# Altium PCB MezcladorBF998.PcbDoc
Units mm, origin at the board's own origin, x right, y up, seen from the top; angles counter-clockwise.
Board outline 67.18 x 25.53 mm, 2 copper layers (Top Layer, Bottom Layer), stack 1.671 mm thick; 57 components, 26 nets, 120 pads, 0 vias.
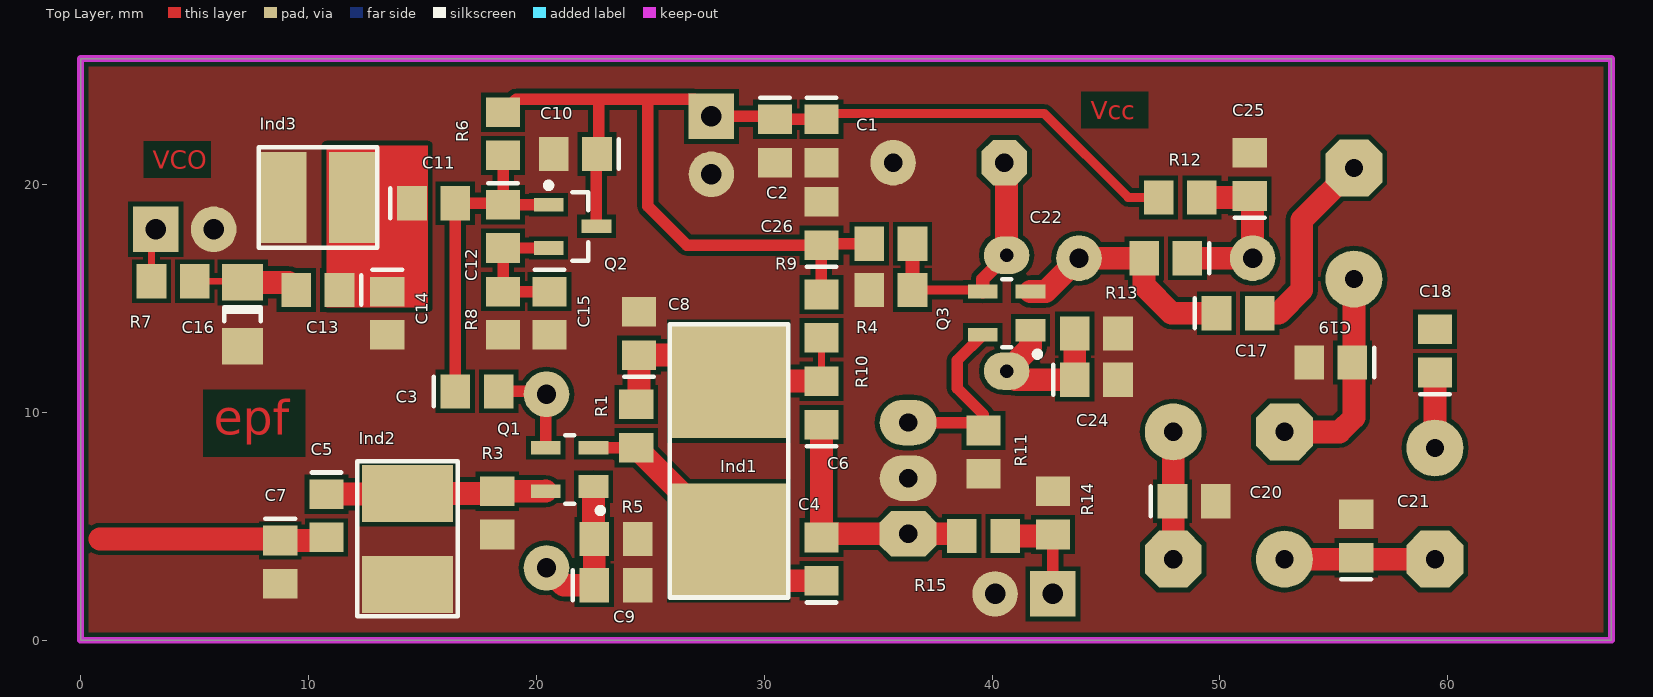
[diagram p0: Top Layer view]
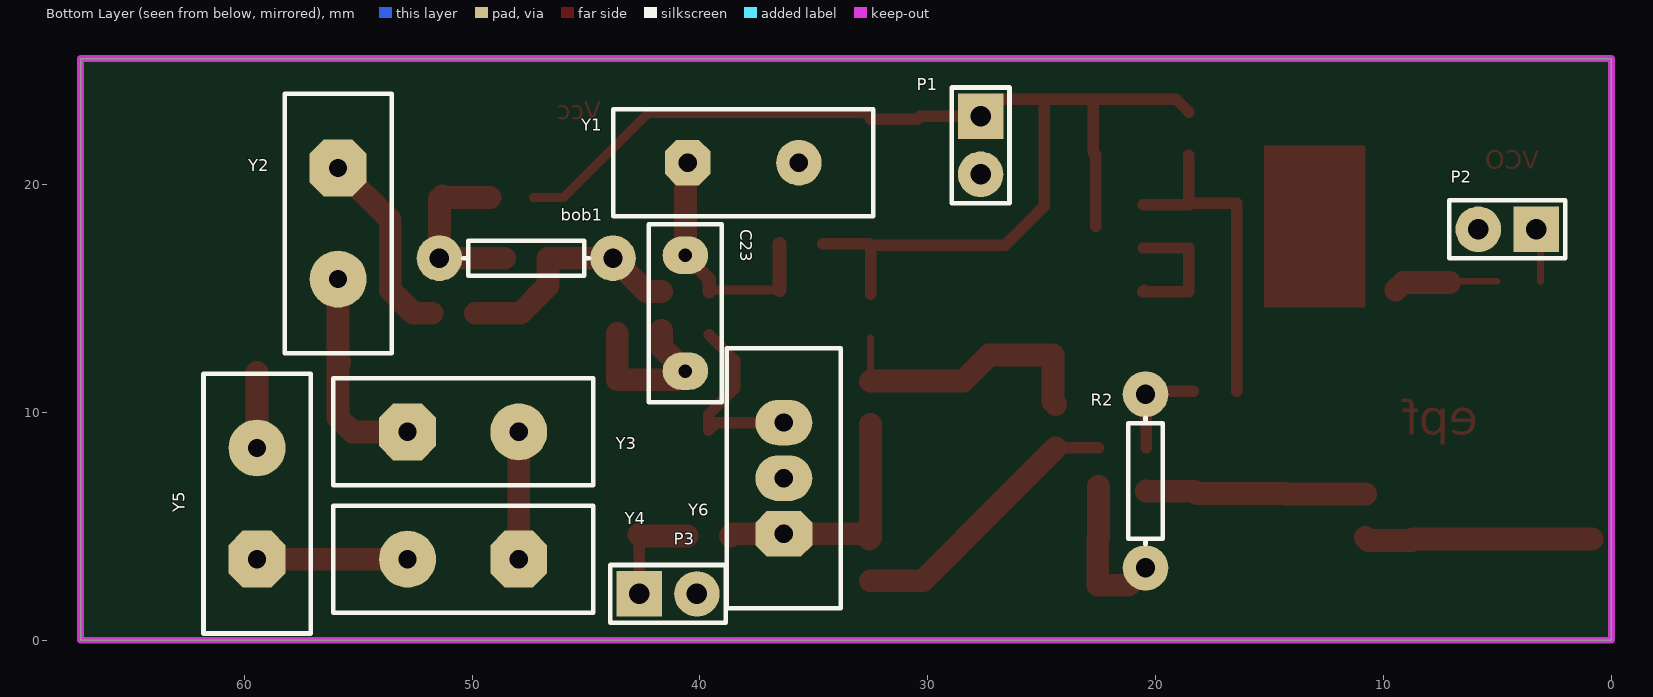
[diagram p1: Bottom Layer view, seen from below]

## Layer stack, top to bottom
Top Layer: signal copper 0.0356
Dielectric: core 1.6, FR-4, Dk 4.8
Bottom Layer: signal copper 0.0356

## Board outline
0,0 67.183,0 67.183,25.527 0,25.527

## Design rules (kind name [scope] priority, off if disabled: settings)
Clearance [All] p1: gap=0.2
PolygonConnect [All] p1: connectstyle=Direct reliefconductorwidth=0.254 reliefentries=4 polygonreliefangle="90 Angle"
RoomDefinition FI2_BF998 [InComponentClass('FI2_BF998')] p1: confinementstyle=ConfineIn formatcopy=TRUE lockcomponents=FALSE outline 29.591,-0.762 63.373,-0.762 63.373,24.384 29.591,24.384
RoomDefinition OsciladorLocal [InComponentClass('OsciladorLocal')] p2: confinementstyle=ConfineIn formatcopy=TRUE lockcomponents=TRUE outline 1.27,8.255 23.876,8.255 23.876,23.876 1.27,23.876
RoomDefinition MixerBF998 [InComponentClass('MixerBF998')] p3: confinementstyle=ConfineIn formatcopy=TRUE lockcomponents=TRUE outline 7.366,0 38.862,0 38.862,16.383 7.366,16.383
RoomDefinition Alimentacion [InComponentClass('Alimentacion')] p4: confinementstyle=ConfineIn formatcopy=TRUE lockcomponents=TRUE outline 25.908,18.669 33.782,18.669 33.782,24.892 25.908,24.892
RoutingVias [All] p1: holewidth=0.6 width=2 viastyle="Through Hole" minholewidth=0.2 minwidth=1.27 maxholewidth=1 maxwidth=3
SilkscreenOverComponentPads [All] p1: minsilkscreentomaskgap=0.254
SolderMaskExpansion [All] p1: expansion=0.102
TestPointUsage [All] p1: valid=0 allowmultiple=FALSE
Testpoint [All] p1: side=15 testpointundercomponent=TRUE minsize=1.016 maxsize=2.54 preferedsize=1.524 minholesize=0 maxholesize=1.016 preferedholesize=0.813 testpointgrid=0.025 style=1023 order=0-112345678
Width [All] p1: maxlimit=3 minlimit=0.2 preferedwidth=1
23 further rules are at their usual default settings.

## Classes and differential pairs
component class FI2_BF998: bob1 C17 C18 C19 C20 C21 C22 C23 C24 C25 C26 P3 Q3 R9 R10 R11 R12 R13 R14 R15 Y1 Y2 Y3 Y4 Y5 Y6
component class OsciladorLocal: C10 C11 C12 C13 C14 C15 C16 Ind3 P2 Q2 R6 R7 R8
component class MixerBF998: C3 C4 C5 C6 C7 C8 C9 Ind1 Ind2 Q1 R1 R2 R3 R4 R5
component class Alimentacion: C1 C2 P1

## Components (designator, comment, footprint, x,y, rotation, side; value= is the part's Value field where it differs from the comment)
bob1 "Res1" AXIAL-0.3#1 47.625,16.764 r180 bottom
C1 "Cap Pol3" C0805 32.512,21.91 r270 top
C2 "Cap Pol3" C0805 30.48,21.91 r270 top
C3 "Cap Pol3" C0805 17.399,10.922 r0 top
C4 "Cap Pol3" C0805 32.512,3.556 r90 top
C5 "Cap Pol3" C0805 10.795,5.461 r270 top
C6 "Cap Pol3" C0805 32.512,10.414 r90 top
C7 "Cap Pol3" C0805 8.763,3.429 r270 top
C8 "Cap Pol3" C0805 24.511,13.462 r90 top
C9 "Cap Pol3" C0805 23.495,2.413 r0 top
C10 "Cap Pol3" C0805 21.717,21.336 r180 top
C11 "Cap Pol3" C0805 15.494,19.177 r0 top
C12 "Cap Pol3" C0805 18.542,18.161 r270 top
C13 "Cap Pol3" C0805 10.414,15.367 r180 top
C14 "Cap Pol3" C0805 13.462,14.351 r270 top
C15 "Cap Pol3" C0805 20.574,14.351 r270 top
C16 "Cap Semi" C1206 7.112,14.303 r270 top
C17 "Cap Pol3" C0805 50.8,14.351 r0 top
C18 "Cap Pol3" C0805 59.436,12.7 r90 top
C19 "Cap Pol3" C0805 54.864,12.192 r180 top
C20 "Cap Pol3" C0805 48.868,6.096 r0 top
C21 "Cap Pol3" C0805 55.98,4.572 r90 top
C22 "Cap Pol3" C0805 47.625,16.764 r180 top
C23 "Cap" VP45-3.2 40.64,14.351 r90 bottom
C24 "Cap Pol3" C0805 44.577,11.43 r0 top
C25 "Cap Pol3" C0805 51.308,20.447 r90 top
C26 "Cap Pol3" C0805 32.512,18.288 r90 top
Ind1 "Ind2" IND_7MM 28.448,7.874 r270 top
Ind2 "Ind2" Ind_4mm 14.351,4.445 r90 top
Ind3 "Ind2" Ind_3mm 10.414,19.431 r0 top
P1 "Header 2" HDR1X2 27.686,22.987 r270 bottom
P2 "Header 2" HDR1X2 3.302,18.034 r0 bottom
P3 "Header 2" HDR1X2 42.672,2.032 r180 bottom
Q1 "BF998" SOT143_N 21.463,7.493 r180 top
Q2 "BFS17" SOT23_N 21.59,18.161 r0 top
Q3 "BF998" SOT143_N 40.64,14.351 r180 top
R1 "Res Semi" 2012[0805] 24.384,9.398 r270 top
R2 "Res1" AXIAL-0.3#2 20.447,6.985 r90 bottom
R3 "Res Semi" 2012[0805] 18.288,5.588 r90 top
R4 "Res Semi" 2012[0805] 32.512,14.224 r270 top
R5 "Res Semi" 2012[0805] 23.495,4.445 r180 top
R6 "Res Semi" 2012[0805] 18.542,22.225 r90 top
R7 "Res Semi" 2012[0805] 4.064,15.753 r0 top
R8 "Res Semi" 2012[0805] 18.542,14.351 r90 top
R9 "Res Semi" 2012[0805] 35.56,15.367 r180 top
R10 "Res Semi" 2012[0805] 35.56,17.399 r0 top
R11 "Res Semi" 2012[0805] 39.624,8.255 r90 top
R12 "Res Semi" 2012[0805] 48.26,19.431 r0 top
R13 "Res Semi" 2012[0805] 44.577,13.462 r180 top
R14 "Res Semi" 2012[0805] 42.672,5.588 r270 top
R15 "Res Semi" 2012[0805] 39.624,4.572 r0 top
Y1 "ECS-49-20-1" HC-49U#1 38.1,20.955 r180 bottom
Y2 "ECS-49-20-1" HC-49U#2 55.88,18.288 r270 bottom
Y3 "ECS-49-20-1" HC-49U#2 50.392,9.144 r180 bottom
Y4 "ECS-49-20-1" HC-49U#2 50.392,3.556 r0 bottom
Y5 "ECS-49-20-1" HC-49U#2 59.436,5.996 r90 bottom
Y6 "ECS-35-17-4-3IL" HC-49US 36.322,7.112 r90 bottom

## Footprints (in the part's own frame and the unit in brackets; to place one, negate y for a bottom-side part, rotate by r counter-clockwise, add the part's x,y. Pads: shape width x height; smd on the part's side, far side on the other; paste and mask are expansions set on the pad)
2012[0805] [mm] "Chip Resistor; Body 2.0 x 1.3 mm (LxW typ)"
  rect 1.3x1.5 smd: 1(-0.95,0) 2(0.95,0)
AXIAL-0.3#1 [mm] "Resistor; 2 Leads"
  round 2 hole 0.85 mask+0.102: 1(-3.81,0) 2(3.81,0)
  silkscreen extent -2.77,-0.76 2.77,0.76
AXIAL-0.3#2 [mm] "Resistor; 2 Leads"
  round 2 hole 0.85: 1(-3.81,0) 2(3.81,0)
  silkscreen extent -2.77,-0.76 2.77,0.76
C0805 [mm] "Chip Capacitor; Body 2.0 x 1.2 mm (LxW typ)"
  rect 1.3x1.5 smd: 1(-0.95,0) 2(0.95,0)
  silkscreen extent -1.9,-0.65 -1.9,0.65
C1206 [mm] "Chip Capacitor; Body 3.2 x 1.6 mm (LxW typ)"
  rect 1.6x1.8 smd: 1(-1.4,0) 2(1.4,0)
  silkscreen extent -0.3,-0.8 0.3,0.8
HC-49U#1 [mm] "Quartz Crystal, Thru-Hole; 2 Leads; Body 11.35 x 4.65 x 13.46 mm (LxWxH max)"
  oct 2x2 hole 0.8 mask+0.102: 1(-2.44,0)
  round 2 hole 0.8 mask+0.102: 2(2.44,0)
  silkscreen extent -5.7,-2.35 5.7,2.35
HC-49U#2 [mm] "Quartz Crystal, Thru-Hole; 2 Leads; Body 11.35 x 4.65 x 13.46 mm (LxWxH max)"
  oct 2.5x2.5 hole 0.8 mask+0.102: 1(-2.44,0)
  round 2.5 hole 0.8 mask+0.102: 2(2.44,0)
  silkscreen extent -5.7,-2.35 5.7,2.35
HC-49US [mm] "Quartz Crystal, Thru-Hole; 3 Leads; Body 11.35 x 5 x 3.5 mm (LxWxH max)"
  oct 2x2.5 hole 0.8 mask+0.102: 1(-2.44,0)
  oval 2x2.5 hole 0.8 mask+0.102: 2(0,0) 3(2.44,0)
  silkscreen extent -5.7,-2.5 5.7,2.5
HDR1X2 [mm] "Connector; Header; 2 Position"
  rect 2x2 hole 0.9: 1(0,0)
  round 2 hole 0.9: 2(2.54,0)
  silkscreen extent -1.27,-1.27 3.81,1.27
Ind_3mm [mm]
  rect 2x4 smd: 1(-1.5,0) 2(1.5,0)
  silkscreen extent -2.6,-2.2 2.6,2.2
Ind_4mm [mm]
  rect 2.5x4 smd: 1(-2,0) 2(2,0)
  silkscreen extent -3.4,-2.2 3.4,2.2
IND_7MM [mm]
  rect 5x5 smd: 1(-3.5,0) 2(3.5,0)
  silkscreen extent -6,-2.6 6,2.6
SOT23_N [mm] "SOT23, 3-Leads, Body 2.9x1.3mm, Pitch 0.95mm, Lead Span 2.3mm, IPC Medium Density"
  rect 1.3x0.6 smd: 1(-1.05,0.95) 2(-1.05,-0.95) 3(1.05,0)
  silkscreen extent -1.17,-1.5 0.7,1.92, body extent -0.7,-1.5 0.7,1.5, height 1.1
SOT143_N [mm] "SOT143, 4-Leads, Body 2.9x1.3mm, Pitch 1.9mm, Lead Span 2.3mm, IPC Medium Density"
  rect 1.3x1 smd: 1(-1.05,0.75)
  rect 1.3x0.6 smd: 2(-1.05,-0.95) 3(1.05,-0.95) 4(1.05,0.95)
  silkscreen extent -1.48,-1.5 0.2,1.92, body extent -0.7,-1.52 0.7,1.52, height 1.1
VP45-3.2 [mm] "Capacitor, Ceramic, Thru-Hole, Dipped Radial; Body 7.8 x 3.2 mm (WxT) Pin Spacing 5.08 mm (typ)"
  oval 1.65x2 hole 0.6: 1(-2.54,0) 2(2.54,0)
  silkscreen extent -3.9,-1.6 3.9,1.6

## Part data
bob1 R2: "Resistor"
C1 C2 C3 C4 C5 C6 C7 C8 C9 C10 C11 C12 C13 C14 C15 C17 C18 C19 C20 C21 C22 C24 C25 C26: "Polarized Capacitor (Surface Mount)"
C16: "Capacitor (Semiconductor SIM Model)"
C23: "Capacitor"
P1 P2 P3: "Header, 2-Pin"
Q1 Q3: "Silicon N-channel Dual-gate MOSFET"
Q2: library part PMBF4416, "N-channel Silicon Junction Field-effect Transistor"
R1 R3 R4 R5 R6 R7 R8 R9 R10 R11 R12 R13 R14 R15: "Semiconductor Resistor"
Y1 Y2 Y3 Y4 Y5: "Crystal Oscillator"
Y6: "Crystal Oscillator, 3rd In-Line Lead Version"

## Nets (pads, with @x,y where several pads share a name; then routed paths per layer and width w, separated by ;. In a path a pad name is that pad's centre, name@x,y a point inside that pad or via, vN(x,y) a via of type N, cw(c..) or ccw(c..) an arc to the next point about the centre after c; other vN are vias at no path point)
FI2: C18.2
GND: C1.2 C2.2 C7.2 C8.2 C9.2 C10.2 C14.2 C15.2 C16.2 C19.2 C20.2 C21.2 C24.2 C25.2 C26.2 Ind2.1 Ind3.1 P1.2 P2.2 P3.2 R3.1 R5.1 R8.1 R9.2 R11.1 R13.1 R14.1 Y1.2 Y6.2
MIXER_OUT: C4.2 C6.1 R15.1 Y6.1 | length 11.3
  Top Layer w1: C6.1 C4.2 ; C4.2@32.573,4.445 C4.2 ; R15.1 38.574,4.672 Y6.1 32.678,4.672 C4.2
Netbob1_1: bob1.1 C22.1 C25.1 R12.2 | length 7.7
  Top Layer w1: C22.1 bob1.1 51.435,19.37 C25.1 ; R12.2 C25.1@51.242,19.431
Netbob1_2: bob1.2 C17.1 C22.2 Q3.2 | length 10.5
  Top Layer w1: Q3.2 42.352,15.301 bob1.2 C22.2 46.675,15.555 47.879,14.351 C17.1
NetC3_2: C3.2 Q1.3 R2.2 | length 4.5
  Top Layer w0.5: C3.2 20.252,10.922 R2.2@20.413,10.761 ; Q1.3 R2.2@20.413,10.761 ; R2.2 R2.2@20.413,10.761
NetC4_1: C4.1 Ind1.2 Q1.2 R1.2 | length 13.1
  Top Layer w0.5: Q1.2 24.379,8.443 R1.2
  Top Layer w1: R1.2 28.448,4.384 Ind1.2 ; Ind1.2@28.946,3.876 Ind1.2 ; C4.1 30.216,2.606 Ind1.2
NetC5_1: C5.1 Ind2.2 Q1.4 R3.2 | length 9.7
  Top Layer w1: C5.1 14.317,6.411 Ind2.2 18.195,6.445 R3.2 20.408,6.538 Q1.4
NetC6_2: C6.2 C8.1 Ind1.1 R1.1 R4.2 | length 12.6
  Top Layer w0.3: C6.2 R4.2
  Top Layer w1: R1.1 24.511,10.475 C8.1 27.31,12.512 Ind1.1 32.502,11.374 C6.2
NetC9_1: C9.1 Q1.1 R2.1 R5.2 | length 6.8
  Top Layer w1: R2.1 21.209,2.413 C9.1 R5.2 22.513,4.477 Q1.1
NetC11_1: C11.1 C13.1 C14.1 Ind3.2
NetC12_2: C12.2 C15.1 Q2.2 R8.2 | length 6
  Top Layer w0.5: C15.1@20.508,15.367 C15.1 R8.2 C12.2 Q2.2
NetC13_2: C13.2 C16.1 R7.2 | length 4.6
  Top Layer w0.3: R7.2 7.062,15.753 C16.1
  Top Layer w1: C16.1 9.128,15.703 C13.2
NetC17_2: C17.2 Y2.1 | length 8.6
  Top Layer w1: C17.2 52.578,14.351 53.594,15.367 53.594,18.442 Y2.1
NetC18_1: C18.1 Y5.2 | length 3.3
  Top Layer w1: Y5.2 C18.1
NetC19_1: C19.1 Y2.2 Y3.1 | length 9.5
  Top Layer w1: Y3.1 55.245,9.144 55.88,9.779 Y2.2 ; C19.1 C19.1@55.88,12.258
NetC20_1: C20.1 Y3.2 Y4.1 | length 5.6
  Top Layer w1: Y4.1 Y3.2
NetC21_1: C21.1 Y4.2 Y5.1 | length 6.6
  Top Layer w1: Y4.2 Y5.1
NetC23_1: C23.1 C24.1 Q3.1 R13.2 | length 7.4
  Top Layer w1: Q3.1 41.69,12.861 C23.1 41.021,11.43 C24.1 R13.2
NetC23_2: C23.2 Q3.3 R9.1 R10.2 Y1.1 | length 11.3
  Top Layer w0.4: R9.1 Q3.3@39.524,15.367
  Top Layer w0.6: R9.1 R10.2 ; Q3.3@39.524,15.367 Q3.3 39.59,15.841 C23.2
  Top Layer w1: Y1.1 40.64,20.855 C23.2
NetP2_1: P2.1 R7.1 | length 2.4
  Top Layer w0.3: R7.1 3.114,17.846 P2.1
NetP3_1: P3.1 R14.2 R15.2 | length 4.7
  Top Layer w0.5: R14.2@42.606,4.572 42.672,4.506 P3.1
  Top Layer w1: R15.2 41.148,4.572 42.606,4.572 R14.2
NetQ3_4: Q3.4 R11.2 Y6.3 | length 8.6
  Top Layer w0.5: Y6.3 39.277,9.552 R11.2 39.624,9.906 38.481,11.049 38.481,12.292 Q3.4
OL: C3.1 C11.2 C12.1 Q2.1 R6.1 | length 14.5
  Top Layer w0.5: C3.1 16.449,19.172 C11.2 18.476,19.177 C12.1 ; R6.1 C12.1 ; Q2.1 C12.1
RF: C5.2 C7.1 | length 10
  Top Layer w1: 0.85,4.445 8.697,4.445 C7.1 10.663,4.379 C5.2
VCC: C1.1 C2.1 C10.1 C26.1 P1.1 Q2.3 R4.1 R6.2 R10.1 R12.1 | length 53.9
  Top Layer w0.4: C1.1 32.766,23.114 42.291,23.114 45.974,19.431 R12.1
  Top Layer w0.5: R6.2 19.116,23.749 22.733,23.749 ; Q2.3 22.64,21.309 C10.1 22.733,21.402 22.733,23.749 ; R4.1 C26.1 ; C1.1 C2.1 30.353,22.987 P1.1 26.924,23.749 24.892,23.749 ; R10.1 32.573,17.399 C26.1 ; 22.733,23.749 24.892,23.749 ; 24.892,23.749 24.892,19.05 26.604,17.338 C26.1

## Polygon pours and split planes (outlines as drawn)
GND on Top Layer "Top Layer-GND" (solid, remove dead copper): 0,25.527 0,0 67.183,0 67.183,25.527

## Keep-outs
Keep-Out Layer:
  the board outline again, w0.3

## Other copper
Top Layer:
  rectangle net NetC11_1: 10.795,14.605 15.24,21.717
  text "Vcc" at 44.323,22.86 h0.8
  text "VCO" at 3.175,20.701 h0.8
  text "epf" at 5.842,9.017 h1.52

## Silkscreen, mask and mechanical layers (free items; w line width, h text height)
Drill Drawing:
  text ".LEGEND" at 17.3,-2.921 h1.52
  text "Drill Drawing." at 17.3,-5.461 h1.52

## Dimensions
0,0 to 67.183,0 on Mechanical 1
0,0 to 0,25.527 on Mechanical 1